# EAGLE board xiao-domino (EAGLE 9.6.2)
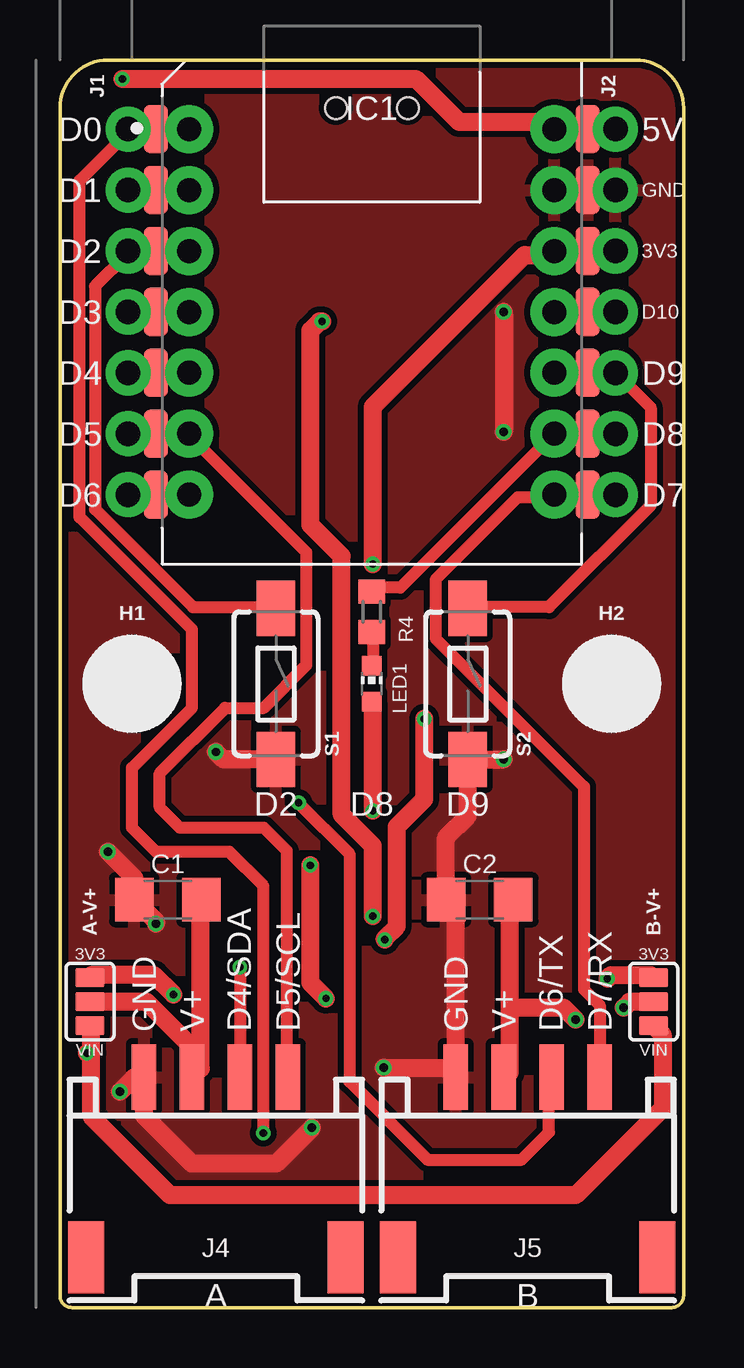
[diagram p0: board, top side]
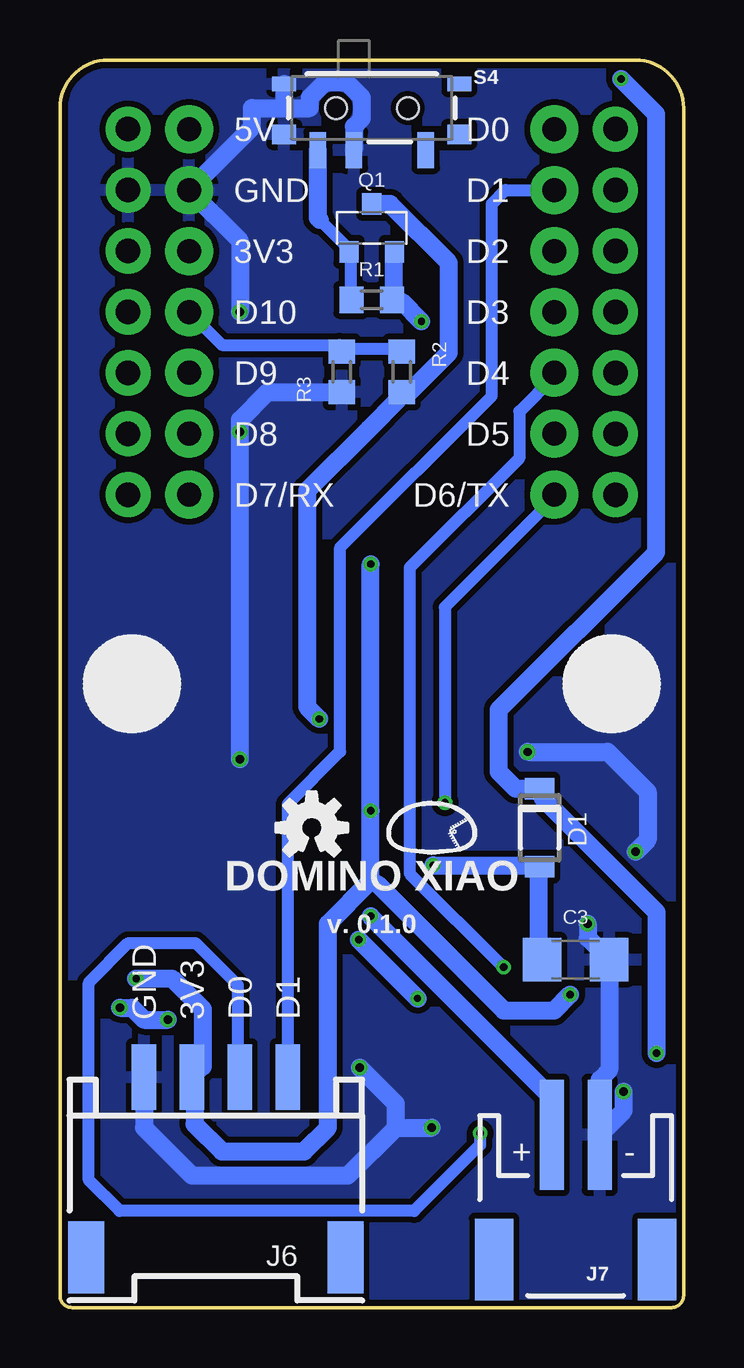
[diagram p1: board, bottom side, seen from below]

Size 26 x 52 mm. Coordinates in mm from the lower left corner, seen from the top.
Outline: 26,0.5 26,50 arc90 24,52 2,52 arc90 0,50 0,0.5 arc90 0.5,0 25.5,0 arc90 26,0.5
Copper layers (1*16): Top 0.035mm / dielectric 1.5mm / Bottom 0.035mm
Design rules "ssci_SeeedStudio_2layer_DRU_no_angle *": minimum track width 0.5mm, minimum drill 12mil, track to track 6mil, track to pad 6mil, pad to pad 6mil, via to via 6mil, smd to smd 0mil, copper to edge 10mil, drill to drill 10mil, minimum pad ring 10mil, minimum via ring 6mil, stop-mask expansion 2mil, vias tented up to drill 25mil, thermal gap 10mil
Net classes: 0 default: width 0.5 mm; 1 pwr: width 0.75 mm, clearance 0.25 mm

## Footprints (pad centres in the part's own frame; a part is rotated, then mirrored left to right if it is on the bottom)
SMT-JUMPER_3_1-NC_PASTE_SILK = smd 0.75 x 1.2: 1 -1,0; 2 0,0; 3 1,0
C3216 = smd 1.6 x 1.8: 1 -1.4,0; 2 1.4,0
SOD123FL = smd 0.91 x 1.22: A 1.625,0; C -1.625,0
MOUNTING_HOLE_SILK_2.1 = hole 2.1: 0,0
XIAO-NRF52840-DIP = drill 1 pad 2: 3V3 7.62,-7.96; 5V 7.62,-2.88; D0 -7.62,-2.88; D1 -7.62,-5.42; D2 -7.62,-7.96; D3 -7.62,-10.5; D4 -7.62,-13.04; D5 -7.62,-15.58; D6 -7.62,-18.12; D7 7.62,-18.12; D8 7.62,-15.58; D9 7.62,-13.04; D10 7.62,-10.5; GND 7.62,-5.42
XIAO-SMD-PROTO = smd 1 x 2: 3V3 9,-7.96; 5V 9,-2.88; D0 -9,-2.88; D1 -9,-5.42; D2 -9,-7.96; D3 -9,-10.5; D4 -9,-13.04; D5 -9,-15.58; D6 -9,-18.12; D7 9,-18.12; D8 9,-15.58; D9 9,-13.04; D10 9,-10.5; GND 9,-5.42
1X07_NO_SILK = drill 1.016 pad 1.88: 1 0,0; 2 2.54,0; 3 5.08,0; 4 7.62,0; 5 10.16,0; 6 12.7,0; 7 15.24,0
HW4-SMD-2.0-90D = smd 1.01 x 2.74: 0 -1,-0.1; 1 -3,-0.1; GND 3,-0.1; V+ 1,-0.1 | smd 1.5 x 3: SS1 -5.4,7.4; SS2 5.4,7.4
JST-2-SMD = smd 1 x 4.6: 1 -1,-3.7; 2 1,-3.7 | smd 1.6 x 3.4: NC1 -3.4,1.5; NC2 3.4,1.5
CHIP-LED0603 = smd 0.8 x 0.8: A 0,-0.75; C 0,0.75
MICRO3 = smd 0.8 x 0.9: 1 -0.95,-1; 2 0.95,-1; 3 0,1
R0603 = smd 1 x 1.1: 1 -0.85,0; 2 0.85,0
TACTILE_SWITCH_SMD_6.0X3.5MM = smd 2.3 x 1.6: 1 -3.15,0; 2 3.15,0
SWITCH_SPST_SMD_A = smd 0.7 x 1.5: 1 -2.25,-1.75; 2 -0.75,-1.75; 3 2.25,-1.75 | smd 1 x 0.6: L$1 -3.65,1; L$4 3.65,1 | smd 1 x 0.8: L$2 -3.65,-1.1; L$3 3.65,-1.1 | hole 0.9: -1.5,0; 1.5,0

## Placement (x,y rotation side)
A-V+  JUMPER-SMT_3_1-NC_PASTE-SILK  [SMT-JUMPER_3_1-NC_PASTE_SILK]  1.25,12.75 90 top
B-V+  JUMPER-SMT_3_1-NC_PASTE-SILK  [SMT-JUMPER_3_1-NC_PASTE_SILK]  24.75,12.75 90 top
C1  100u  [C3216]  4.5,17 180 top
C2  100u  [C3216]  17.5,17 180 top
C3  100u  [C3216]  4.5,14.5 0 bottom
D1  SMF5.0AT1  [SOD123FL]  6,20 270 bottom
H1  HOLE-SILK-2.1  [MOUNTING_HOLE_SILK_2.1]  3,26 0 top
H2  HOLE-SILK-2.1  [MOUNTING_HOLE_SILK_2.1]  23,26 0 top
IC1  SEEED-STUDIO-XIAO-NRF52840-DIP  [XIAO-NRF52840-DIP]  13,52 0 top
IC2  SEEED-STUDIO-XIAO-NRF52840-PROTO-ALL  [XIAO-SMD-PROTO]  13,52 0 top
J1  [1X07_NO_SILK]  2.84,49.12 270 top
J2  [1X07_NO_SILK]  23.16,49.12 270 top
J4  I2C-GROVESMD-90D  [HW4-SMD-2.0-90D]  6.5,9.5 180 top
J5  GROVE-CONNECTOR-SMD90D  [HW4-SMD-2.0-90D]  19.5,9.5 180 top
J6  GROVE-CONNECTOR-SMD90D  [HW4-SMD-2.0-90D]  19.5,9.5 180 bottom
J7  [JST-2-SMD]  4.5,3.5 180 bottom
LED1  [CHIP-LED0603]  13,26 0 top
LOGO1  LOGO  [LOGO]  10.5,20 0 bottom
LOGO2  OSHW-LOGOS  [OSHW-LOGO-S]  15.5,20 0 bottom
Q1  IRLML5203  [MICRO3]  13,45 0 bottom
R1  47k  [R0603]  13,42 0 bottom
R2  200k  [R0603]  11.75,39 270 bottom
R3  200k  [R0603]  14.25,39 90 bottom
R4  330  [R0603]  13,29 90 top
S1  MOMENTARY-SWITCH-SPST-SMD-6.0X3.5MM  [TACTILE_SWITCH_SMD_6.0X3.5MM]  9,26 270 top
S2  MOMENTARY-SWITCH-SPST-SMD-6.0X3.5MM  [TACTILE_SWITCH_SMD_6.0X3.5MM]  17,26 270 top
S4  SWITCH-SPDT-LEGS-S  [SWITCH_SPST_SMD_A]  13,50 0 bottom

## Library data of the parts
A-V+ B-V+ = Botamochi-Jumper
C1-C3 = rcl; SPICEPREFIX: C
D1 = diode
H1 H2 = Botamochi-Hole
IC1 IC2 = Seeed Studio XIAO
J1 J2 = SparkFun-Connectors
J4-J6 = SEEED-GROVE-CONNECTOR
J7 = SparkFun-Connectors; PROD_ID: CONN-11443; SF_ID: PRT-08612
LED1 = led
LOGO1 = botamochi-symbol
LOGO2 = SparkFun-Aesthetics
Q1 = transistor-power
R1-R4 = rcl; SPICEPREFIX: R
S1 S2 = SparkFun-Switches; PROD_ID: SWCH-00815; SF_SKU: COM-08229
S4 = Botamochi-Switch

## Nets
+3V3 [pwr]: A-V+.3 B-V+.3 IC1.3V3 IC2.3V3 J2.3 J6.V+ LED1.A
+5V [pwr]: A-V+.1 B-V+.1 D1.C IC1.5V IC2.5V J2.1
BAT [pwr]: J7.2 Q1.2 R1.2
BAT1 [pwr]: C3.1 D1.A Q1.3 R2.2
D0: IC1.D0 IC2.D0 J1.1 J6.0
D1: IC1.D1 IC2.D1 J1.2 J6.1
D2: IC1.D2 IC2.D2 J1.3 S1.1
D3: IC1.D3 IC2.D3 J1.4
D4/SDA: IC1.D4 IC2.D4 J1.5 J4.0
D5/SCL: IC1.D5 IC2.D5 J1.6 J4.1
D6/TX: IC1.D6 IC2.D6 J1.7 J5.0
D7/RX: IC1.D7 IC2.D7 J2.7 J5.1
D8: IC1.D8 IC2.D8 J2.6 R4.2
D9: IC1.D9 IC2.D9 J2.5 S2.1
D10: IC1.D10 IC2.D10 J2.4 R2.1 R3.2
GND [pwr]: C1.2 C2.2 C3.2 IC1.GND IC2.GND J2.2 J4.GND J5.GND J6.GND J7.1 R3.1 S1.2 S2.2 S4.2 S4.L$1 S4.L$2
N$1 [pwr]: A-V+.2 C1.1 J4.V+
N$2 [pwr]: B-V+.2 C2.1 J5.V+
N$3: Q1.1 R1.1 S4.1
N$4: LED1.C R4.1

## Tracks (layer width: path | path; a pad name or v marks a point on that pad's centre or on a via)
+3V3  (via drill 0.3)
  Top 0.75: J2.3 23,44.04 22.02,44.04 IC2.3V3 21.69,44.04 20.71,44.04 IC1.3V3 20.39,43.87 19.37,43.87 13.05,37.55 v13.05,30.99 | v13.05,20.71 13.05,25.12 LED1.A | v4.73,13.05 3.91,13.86 1.3,13.86 A-V+.3 | v22.82,13.71 22.98,13.86 24.63,13.86 B-V+.3
  Bottom 0.75: 13.05,17.78 v13.05,20.71 v13.05,30.99 | 13.05,17.78 14.83,15.99 14.83,7.49 15.82,6.5 19.25,6.5 20.39,7.64 20.39,9.46 J6.V+ 20.05,10.05 20.05,12.44 21.32,13.71 v22.82,13.71 | v4.73,13.05 5.39,12.38 7.49,12.38 12.72,17.61 13.05,17.78
+5V  (via drill 0.3)
  Top 0.75: J2.1 23,49.26 22.02,49.26 IC2.5V 21.69,49.26 20.71,49.26 IC1.5V 20.39,49.42 16.64,49.42 14.84,51.21 v2.61,51.21 | 1.3,10.6 1.3,7.97 4.59,4.69 21.51,4.69 25.13,8.31 25.13,11.37 B-V+.1 | 1.3,10.6 1.3,11.74 A-V+.1 | v1.13,10.6 1.3,10.6
  Bottom 0.75: v1.13,10.6 1.13,16.48 5.87,21.22 5.87,21.53 D1.C 7,21.62 7.71,22.33 7.71,24.91 1.14,31.48 1.14,49.74 v2.61,51.21
BAT  (via drill 0.3)
  Top 0.75: v10.93,41.1 10.82,41.1 10.44,40.72 10.44,32.62 11.74,31.32 11.74,20.55 13.05,19.25 v13.05,16.31
  Bottom 0.75: Q1.2 12.07,43.87 12.07,42.08 R1.2 11.74,41.92 v10.93,41.1 | v13.05,16.31 5.54,8.81 5.54,7.34 J7.2
BAT1  (via drill 0.3)
  Top 0.75: v10.44,18.43 10.44,13.54 v11.09,12.88 | v13.54,15.33 13.54,15.38 14.05,15.9 14.05,20.05 15.19,21.19 v15.19,24.53
  Bottom 0.75: C3.1 6.04,14.52 6.04,18.27 D1.A 6.36,18.43 v10.44,18.43 | Q1.3 12.88,45.99 12.23,45.99 9.79,43.55 9.79,39.8 11.42,38.16 11.74,38.16 R2.2 11.91,37.84 13.12,36.62 15.69,34.06 15.69,25.03 v15.19,24.53 | v13.54,15.33 v11.09,12.88
D0  (via drill 0.3)
  Top 0.5: v8.48,7.28 8.48,17.57 7.05,19 4,19 3,20 3,22.5 5.5,25 5.5,28.26 0.82,32.95 0.82,46.97 2.77,48.93 J1.1 2.94,49.26 3.91,49.26 IC2.D0 4.24,49.09 5.22,49.09 IC1.D0
  Bottom 0.5: v8.48,7.28 8.48,6.78 11.23,4.02 23.52,4.02 24.8,5.31 24.8,13.54 23.15,15.19 20.34,15.19 18.59,13.44 18.59,9.62 J6.0
D1
  Top 0.5: J1.2 2.94,46.65 3.91,46.65 IC2.D1 4.24,46.65 5.22,46.65 IC1.D1
  Bottom 0.5: J6.1 16.5,20.98 14.31,23.17 14.31,31.68 8,38 8,46 7.42,46.58 IC1.D1
D2
  Top 0.5: S1.1 8.97,29.2 5.54,29.2 1.47,33.27 1.47,42.57 2.77,43.87 J1.3 2.94,44.04 3.91,44.04 IC2.D2 4.24,44.04 5.22,44.04 IC1.D2
D3
  Top 0.5: J1.4 2.94,41.59 3.91,41.59 IC2.D3 4.24,41.59 5.22,41.59 IC1.D3
D4/SDA  (via drill 0.3)
  Top 0.5: J1.5 2.94,38.98 3.91,38.98 IC2.D4 4.24,38.98 5.22,38.98 IC1.D4 | v7.5,14.19 7.5,9.62 J4.0
  Bottom 0.5: v7.5,14.19 11.42,18.1 11.42,30.83 6.85,35.39 6.85,37.35 5.38,38.82 IC1.D4
D5/SCL
  Top 0.5: J1.6 2.94,36.53 3.91,36.53 IC2.D5 4.24,36.37 5.22,36.37 IC1.D5 5.38,36.37 10.28,31.48 10.28,26.77 8.5,25 6.88,25 4.17,22.28 4.17,20.83 5,20 8.5,20 9.46,19.04 9.46,9.62 J4.1
D6/TX  (via drill 0.3)
  Top 0.5: J1.7 2.94,33.92 3.91,33.92 IC2.D6 4.24,33.92 5.22,33.92 IC1.D6 | v9.95,21.04 12.07,18.92 12.07,9.42 15.32,6.17 19.25,6.17 20.39,7.31 20.39,9.46 J5.0
  Bottom 0.5: v9.95,21.04 9.95,29.2 5.38,33.76 IC1.D6
D7/RX
  Top 0.5: J2.7 23,33.92 22.02,33.92 IC2.D7 21.86,33.92 20.71,33.92 IC1.D7 20.55,33.76 19.08,33.76 15.66,30.34 15.66,27.89 21.84,21.7 21.84,13.26 22.5,12.6 J5.1
D8
  Top 0.5: J2.6 23,36.53 22.02,36.53 IC2.D8 21.86,36.53 20.71,36.53 IC1.D8 20.55,36.37 14.19,30.01 13.05,30.01 R4.2
D9
  Top 0.5: S2.1 17.12,29.2 20.39,29.2 24.63,33.44 24.63,37.51 23.32,38.82 J2.5 23,38.98 22.02,38.98 IC2.D9 21.86,38.98 20.71,38.98 IC1.D9
D10
  Top 0.5: J2.4 23,41.59 22.02,41.59 IC2.D10 21.86,41.59 20.71,41.59 IC1.D10
  Bottom 0.5: R2.1 11.91,39.96 14.19,39.96 R3.2 14.35,40.12 19.25,40.12 20.55,41.43 IC1.D10
GND  (via drill 0.35)
  Top 0.75: v2,19 3.1,17.9 C1.2 4,16.1 v4,16 | S1.2 6.81,22.85 v6.5,23.16 | v18.5,22.85 S2.2 17,20.5 16.1,19.6 C2.2 16.5,16.6 J5.GND 16.1,10 v13.5,10 | v18.5,41.5 v18.5,36.5 | IC1.GND IC2.GND J2.2 | v2.5,9 3.1,9.6 J4.GND 3.5,8 5.5,6 9,6 v10.5,7.5
  Bottom 0.75: v6.5,23.16 3.16,23.16 1.5,21.5 1.5,19.5 v2,19 | v4,16 4,15.4 C3.2 3.1,9.9 3.5,9.5 J7.1 2.5,8.2 v2.5,9 | 16.5,50 18,50 18,49.2 IC1.GND 18.5,44.46 v18.5,41.5 | 16.5,50 15.58,50 15.58,50.45 14.95,51.08 14.05,51.08 13.42,50.45 13.42,49.55 13.75,49.22 S4.2 | v18.5,22.85 v18.5,36.5 18.5,37 17.35,38.15 R3.1 | J6.GND 22.5,7.5 20.5,5.5 14,5.5 12,7.5 | 12,7.5 12,8.5 v13.5,10 | 12,7.5 v10.5,7.5 | S4.L$1 16.65,50.15 16.5,50
  pour Top: -1.5,53 29,53 29,-0.5 -1.5,-0.5
  pour Bottom: -0.5,53 28,53 28,-1 -0.5,-1
N$1
  Top 0.75: C1.1 5.87,16.96 5.87,9.95 5.54,9.62 J4.V+ 5.5,10.84 5.51,10.85 3.61,12.75 A-V+.2
N$2  (via drill 0.35)
  Top 0.75: 18.76,12.5 18.76,9.79 18.59,9.62 J5.V+ | 18.76,12.5 18.76,16.96 C2.1 | B-V+.2 23.75,12.75 v23.5,12.5 | v21.5,12 21,12.5 18.76,12.5
  Bottom 0.75: v23.5,12.5 23,12.5 22.5,12 v21.5,12
N$3
  Bottom 0.5: R1.1 13.86,42.08 13.86,43.87 Q1.1 14.03,44.2 15.17,45.34
  Bottom 0.75: 15.17,45.34 15.25,45.42 S4.1
N$4
  Top 0.5: LED1.C 13.05,26.91 13.05,28.05 R4.1

## Text on the board
tNames: D0 | 5V | D1 | GND | D2 | 3V3 | D3 | D10 | D4 | D9 | D5 | D8 | D6 | D7 | D2 | D8 | D9 | 3V3 | 3V3 | GND | V+ | D4/SDA | D5/SCL | GND | V+ | D6/TX | D7/RX | VIN | VIN | A | B
bNames: D0 | 5V | D1 | GND | D2 | 3V3 | D3 | D10 | D4 | D9 | D5 | D8 | D6/TX | D7/RX | DOMINO XIAO | v. 0.1.0 | D1 | D0 | 3V3 | GND | - | +
_tNames: J1 | J2 | IC1 | H1 | H2 | C1 | C2 | J4 | J5
_bNames: J8 | J6 | J7 | C3 | J9 | J3